# Allegro board ESP32_LED4.brd
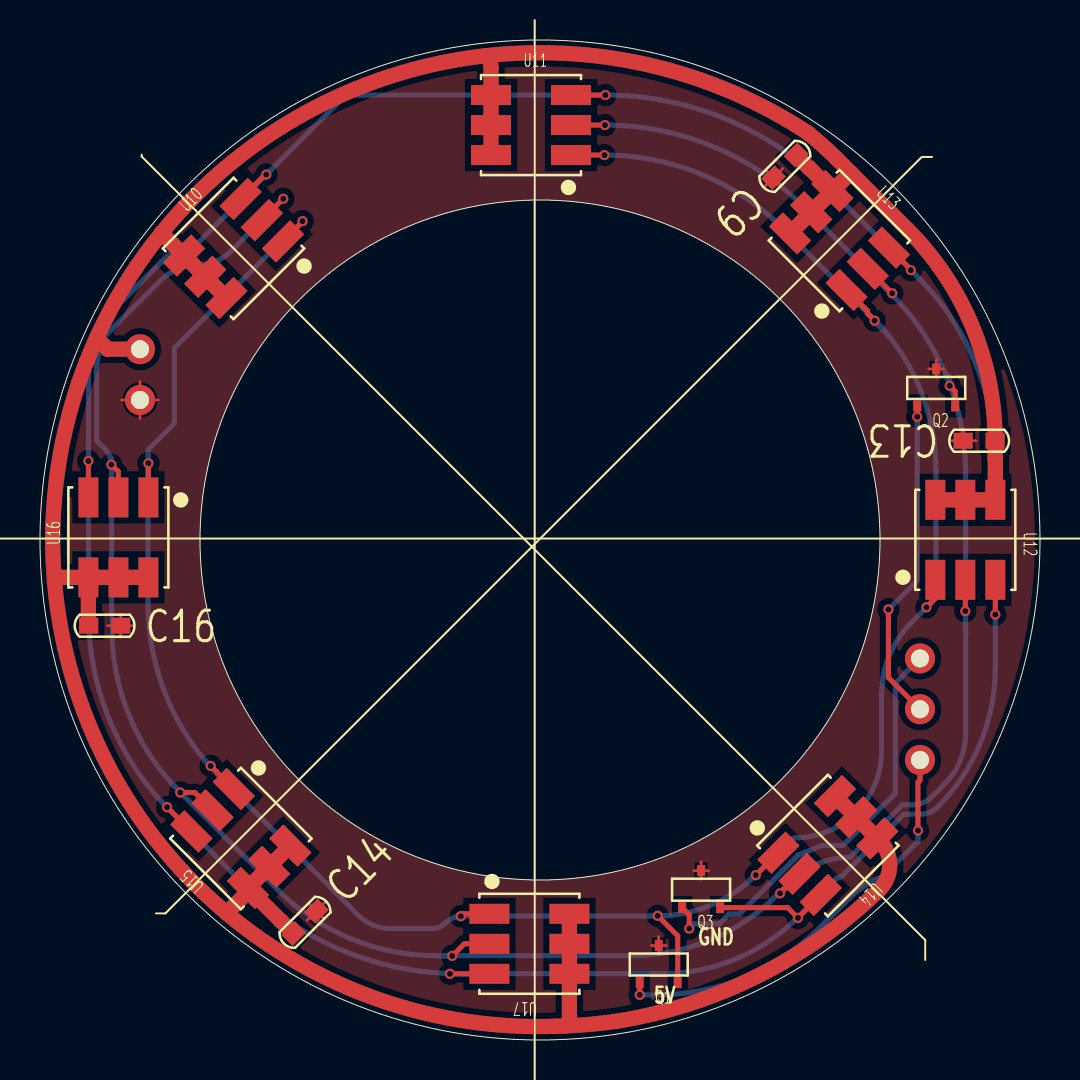
[diagram p0: board, top side]
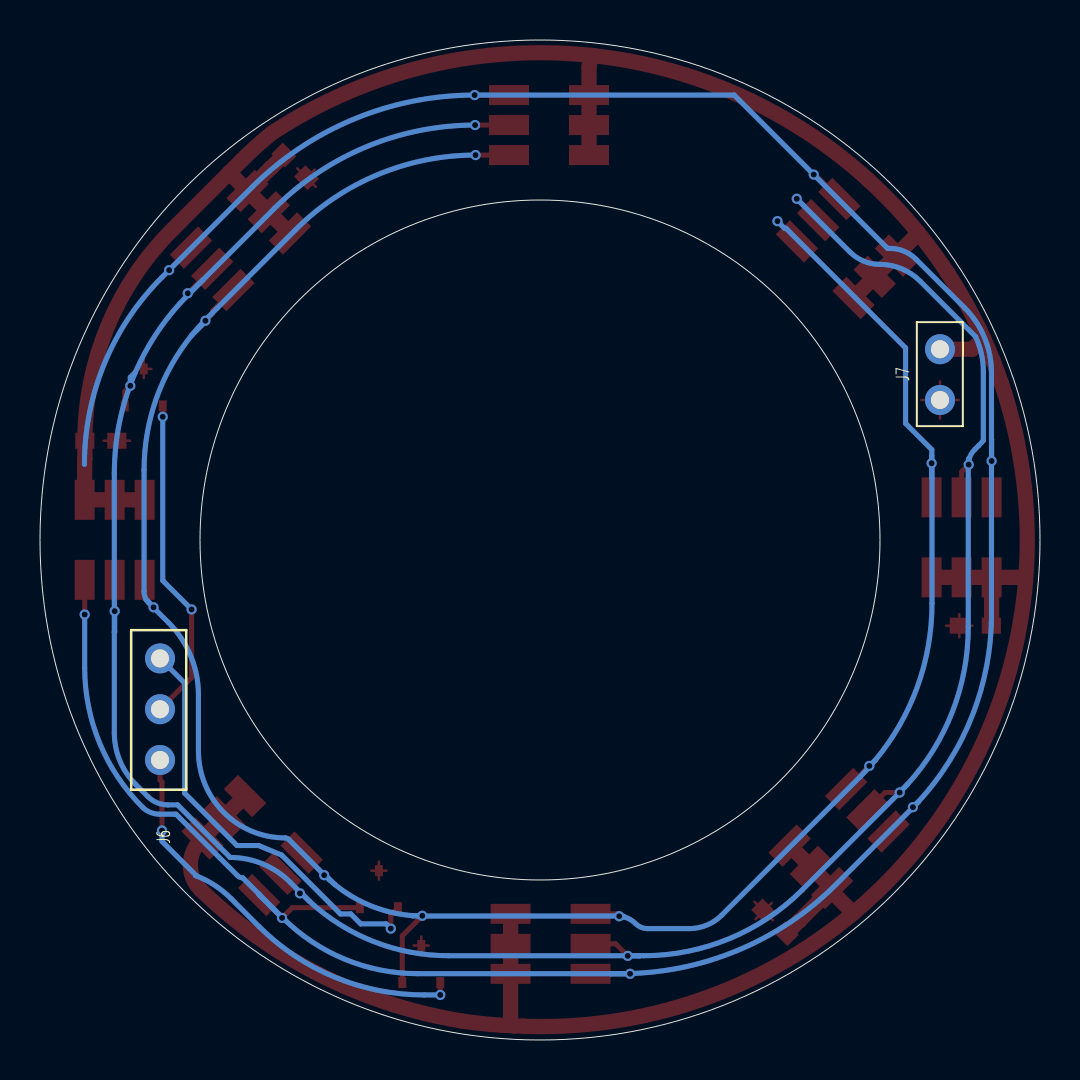
[diagram p1: board, bottom side, seen from below]

Outline 50 x 50 mm; copper layers: TOP, BOTTOM. Coordinates in mm from the lower left corner of the outline.
Outline path: circle c25,25 r17 ; circle c25,25 r25

## Placement (name value [footprint] x y rotation side)
C9  0.1uF/16V  [C0603]  37.81 44.25 225 top
C13  0.1uF/16V  [C0603]  47.76 29.96 180 top
C14  0.1uF/16V  [C0603]  12.69 5.32 45 top
C16  0.1uF/16V  [C0603]  2.43 20.71 0 top
J6  CON3  [CON_2_54_3P]  44 14 90 bottom
J7  CON2  [CON_2_54_2P]  5 32 90 bottom
Q1  S8050(NPN)  [SOT23-3]  30.94 4.72 0 top
Q2  S8050(NPN)  [SOT23-3]  44.81 33.55 0 top
Q3  S8050(NPN)  [SOT23-3]  33.05 8.47 0 top
U10  RGB  [RGB_6]  9.68 39.58 45 top
U11  RGB  [RGB_6]  24.55 45.75 0 top
U12  RGB  [RGB_6]  46.27 25.01 270 top
U13  RGB  [RGB_6]  39.97 39.97 315 top
U14  RGB  [RGB_6]  39.39 9.72 225 top
U15  RGB  [RGB_6]  10.04 10.07 135 top
U16  RGB  [RGB_6]  3.92 25.13 90 top
U17  RGB  [RGB_6]  24.47 4.81 180 top

## Library data of the parts
C9 C13 C14 C16 = CAP NP
J6 = CON3
J7 = CON2
Q1-Q3 = NPN BCE
U10-U17 = LED_RGB

## Footprints (pads in the part's own frame, mm; a bottom-side part is the same pattern mirrored in y, then rotated)
C0603
  rect 0.96x0.8 smd: 1(0,0) 2(1.6,0)
CON_2_54_2P
  round 1.5 hole 0.9: 1(0,0) 2(2.54,0)
CON_2_54_3P
  round 1.5 hole 0.9: 1(0,0) 2(2.54,0) 3(5.08,0)
RGB_6
  rect 2x1 smd: 1(2,-1.5) 2(2,0) 3(2,1.5) 4(-2,1.5) 5(-2,0) 6(-2,-1.5)
SOT23-3
  rect 0.4x0.55 smd: 1(-0.95,-1.85) 2(0.95,-1.85) 3(0,0)

## Nets
GND: C9.2 C13.2 C14.2 C16.2 J7.1 Q1.3(E) Q2.3(E) Q3.3(E)
VDD33: C9.1 C13.1 C14.1 C16.1 J7.2 U10.4(BA) U10.5(GA) U10.6(RA) U11.4(BA) U11.5(GA) U11.6(RA) U12.4(BA) U12.5(GA) U12.6(RA) U13.4(BA) U13.5(GA) U13.6(RA) U14.4(BA) U14.5(GA) U14.6(RA) U15.4(BA) U15.5(GA) U15.6(RA) U16.4(BA) U16.5(GA) U16.6(RA) U17.4(BA) U17.5(GA) U17.6(RA)
B: J6.3 Q3.1(B)
G: J6.2 Q2.1(B)
LED_B: Q3.2(C) U10.3(BK) U11.3(BK) U12.3(BK) U13.3(BK) U14.3(BK) U15.3(BK) U16.3(BK) U17.3(BK)
LED_G: Q2.2(C) U10.2(GK) U11.2(GK) U12.2(GK) U13.2(GK) U14.2(GK) U15.2(GK) U16.2(GK) U17.2(GK)
LED_R: Q1.2(C) U10.1(RK) U11.1(RK) U12.1(RK) U13.1(RK) U14.1(RK) U15.1(RK) U16.1(RK) U17.1(RK)
R: J6.1 Q1.1(B)

## Via types
v1: diameter 0.508, hole 0.305, TOP to BOTTOM, 31 vias

## Routing (per net, layer and track width the routed paths; a pad name or vN(x,y) marks a point on that pad's centre or on a via; arc(x,y) is an arc through that point)
GND: length 18.6
  TOP w0.127: C9.2 37.14,43.58 ; C9.2 36.27,43.52 ; C9.2 36.21,42.65 ; C9.2 37.08,42.71 ; Q3.3 33.43,8.47 ; Q3.3 33.05,8.01 ; Q3.3 32.68,8.47 ; Q3.3 33.05,8.92 ; 44.43,33.55 Q2.3 ; Q2.3 44.81,34.01 ; Q2.3 45.19,33.55 ; Q2.3 44.81,33.1 ; 13.41,6.86 C14.2 ; C14.2 13.35,5.98 ; C14.2 14.28,6.91 ; C14.2 14.23,6.04 ; Q1.3 30.94,5.18 ; Q1.3 30.94,4.27 ; Q1.3 30.56,4.72 ; Q1.3 31.31,4.72 ; 46.16,29.39 C13.2 ; C13.2 46.81,29.96 ; C13.2 45.5,29.96 ; C13.2 46.16,30.54 ; C16.2 4.03,21.29 ; C16.2 4.03,20.14 ; C16.2 4.69,20.71 ; C16.2 3.38,20.71 ; 5,31.07 J7.1 ; J7.1 5.93,32 ; J7.1 4.07,32 ; J7.1 5,32.93
VDD33: length 179.8
  TOP w0.762: U13.4 38.46,43.61 38.45,43.61 C9.1 37.86,44.3 ; U13.4 39.62,42.45 40.53,43.37 ; U13.4 U13.5 U13.6 ; U16.4 2.42,20.73 C16.1 ; U16.4 U16.5 U16.6 ; U16.4 0.95,23.13 0.73,22.91 ; 6.07,40.35 7.2,39.22 U10.4 U10.5 U10.6 ; 6.07,40.35 arc(7.27,41.71) 8.56,42.98 8.59,43.01 arc(14.96,47.2) 22.3,49.22 ; 6.07,40.35 arc(5.32,39.37) 4.62,38.36 4.59,38.31 arc(3.65,36.74) 2.82,35.09 ; 22.3,49.22 22.36,49.22 arc(30.72,48.68) 38.4,45.35 arc(39.16,44.7) 39.88,44.02 40.53,43.37 ; 22.3,49.22 arc(22.49,48.94) 22.55,48.62 U11.4 U11.5 U11.6 ; 9.33,6.34 10.4,7.41 U15.4 ; 9.33,6.34 arc(17.05,1.98) 25.82,0.69 26.29,0.71 ; 9.33,6.34 arc(8.74,6.86) 8.16,7.39 arc(3.03,14.47) 0.73,22.91 ; 2.37,33.96 2.32,33.91 ; 2.32,33.91 arc(2.13,33.4) 1.94,32.88 arc(0.82,27.96) 0.73,22.91 ; 2.32,33.91 arc(2.57,34.51) 2.82,35.09 ; U15.4 12.04,5.96 12.04,5.96 C14.1 ; U15.4 U15.5 U15.6 ; 26.29,0.71 26.47,0.88 U17.4 U17.5 U17.6 ; 26.29,0.71 arc(27.59,0.79) 28.89,0.95 arc(35.94,3.23) 41.98,7.52 arc(42.48,8.75) 41.98,9.97 U14.4 U14.5 U14.6 ; 40.53,43.37 43.38,40.52 arc(46.62,35.67) C13.1 47.76,29.06 47.77,29.04 U12.4 U12.5 U12.6 ; J7.2 3.38,34.54 2.82,35.09
B: length 21.5
  TOP w0.254: Q3.1 32.46,6.26 v1(32.46,5.57)
  BOTTOM w0.254: v1(32.46,5.57) 32.7,5.81 33.96,5.81 34.46,6.3 34.98,6.3 37.92,9.25 39.07,9.72 40.15,9.72 42.76,12.34 42.76,17.84 J6.3
G: length 16.4
  TOP w0.254: v1(42.42,21.53) 42.42,18.12 J6.2 ; Q2.1 v1(43.86,31.16)
  BOTTOM w0.254: v1(42.42,21.53) 43.86,22.97 v1(43.86,31.16)
LED_B: length 161.2
  TOP w0.254: U10.3 11.25,43.27 v1(11.31,43.27) ; U17.3 v1(20.5,3.31) ; v1(43.54,38.49) 43.54,38.53 U13.3 ; U12.3 v1(47.77,21.27) ; U15.3 v1(6.35,11.64) ; Q3.2 37.38,6.62 v1(37.9,6.1) U14.3 ; U11.3 v1(28.27,47.25) ; U16.3 v1(2.42,28.95)
  BOTTOM w0.254: v1(6.35,11.64) 6.06,11.93 ; 6.06,11.93 arc(6.27,11.71) 6.48,11.5 10.22,7.76 arc(15.14,4.47) 20.94,3.32 21.48,3.32 ; 6.06,11.93 arc(3.37,16.26) 2.43,21.28 2.43,30.02 ; v1(2.42,28.95) 2.42,30.01 2.43,30.02 ; v1(47.77,21.27) 47.77,18.61 arc(47.02,14.84) 44.88,11.65 arc(44.49,11.38) 44.02,11.29 43.29,11.29 arc(43.24,11.29) 43.19,11.29 40.12,8.21 arc(40,8.14) 39.86,8.11 39.05,7.3 ; v1(20.5,3.31) 21.47,3.31 21.48,3.32 ; 2.43,30.02 2.43,33.36 arc(2.78,35.12) 3.77,36.61 6.2,39.04 arc(6.8,39.44) 7.5,39.58 7.62,39.58 v1(11.31,43.27) 15.29,47.25 v1(28.27,47.25) arc(34.29,46.05) 39.4,42.64 v1(43.54,38.49) 43.91,38.13 arc(46.77,33.84) 47.78,28.78 ; 39.05,7.3 39.05,7.26 v1(37.9,6.1) ; 39.05,7.3 37.87,6.11 arc(34.77,4.04) 31.12,3.32 21.48,3.32
LED_G: length 142.5
  TOP w0.254: v1(3.57,28.77) 3.92,28.41 U16.2 ; U12.2 v1(46.27,21.44) ; Q2.2 45.76,32.43 v1(45.49,32.71) ; U17.2 21.22,4.81 v1(20.61,4.21) ; U14.2 v1(37,7.33) ; v1(12.16,42.06) 12.16,42.06 U10.2 ; v1(7.01,12.37) 7.74,12.37 U15.2 ; U11.2 v1(28.25,45.75) ; U13.2 v1(42.61,37.34)
  BOTTOM w0.254: 20.02,4.21 19.82,4.21 arc(15.53,5.07) 11.89,7.5 7.01,12.38 arc(6.81,12.58) 6.62,12.79 ; 20.02,4.21 20.02,4.21 v1(20.61,4.21) ; 20.02,4.21 29.58,4.21 arc(33.3,4.92) 36.52,6.93 ; v1(3.57,28.77) 3.57,29.06 3.53,29.1 ; 41.83,38.02 42.59,37.27 arc(42.8,37.05) 43.01,36.83 arc(44.26,35.2) 45.23,33.39 ; 41.83,38.02 38.25,41.6 arc(33.66,44.67) v1(28.25,45.75) ; 41.83,38.02 42.52,37.34 v1(42.61,37.34) ; 46.28,20.38 46.27,20.4 v1(46.27,21.44) ; 46.28,20.38 46.28,15.35 arc(46.01,13.96) 45.22,12.79 44.6,12.17 arc(44.15,11.86) 43.61,11.76 43.12,11.76 40.49,9.13 arc(38.86,8.8) 37.48,7.88 36.82,7.21 arc(36.67,7.07) 36.52,6.93 ; 46.28,20.38 46.28,28.34 arc(46.02,30.92) 45.23,33.39 ; v1(45.49,32.71) 45.49,33.13 45.23,33.39 ; 6.62,12.79 7.01,12.4 v1(7.01,12.37) ; 6.62,12.79 arc(4.37,16.43) 3.59,20.65 3.59,28.75 arc(3.57,28.93) 3.53,29.1 ; v1(37,7.33) 36.92,7.33 36.52,6.93 ; v1(12.16,42.06) 9.5,39.4 arc(8.82,38.94) 8.01,38.78 arc(6.92,38.57) 6,37.95 3.22,35.17 arc(2.93,34.32) 2.83,33.42 2.83,29.98 arc(2.94,29.85) 3.06,29.72 3.27,29.52 arc(3.42,29.32) 3.53,29.1
LED_R: length 133.3
  TOP w0.254: U16.1 v1(5.42,28.84) ; v1(30.88,6.21) 31.89,5.21 Q1.2 ; U14.1 v1(35.79,8.24) ; v1(41.73,35.96) 41.37,36.32 41.37,36.46 U13.1 ; v1(44.32,21.63) 44.77,22.08 U12.1 ; 12.15,39.93 13.13,40.91 v1(13.13,40.94) ; U17.1 21.16,6.31 v1(21.04,6.19) ; U15.1 v1(8.53,13.7) ; U11.1 v1(28.22,44.25)
  BOTTOM w0.254: 42.43,35.21 41.73,35.92 v1(41.73,35.96) ; 42.43,35.21 arc(44.19,32.06) 44.8,28.51 44.8,22.42 arc(44.77,22.22) 44.7,22.03 ; 42.43,35.21 arc(42.06,35.65) 41.66,36.07 41.15,36.58 37.21,40.52 arc(33.09,43.28) v1(28.22,44.25) ; 31.38,6.22 31.37,6.21 v1(30.88,6.21) ; 31.38,6.22 arc(31.11,6.2) 30.84,6.2 21.13,6.2 arc(20.96,6.19) 20.79,6.15 ; 31.38,6.22 arc(33.44,6.7) 35.26,7.78 ; v1(44.32,21.63) 44.32,21.66 44.7,22.03 ; 5.4,28.09 5.4,28.75 arc(5.4,28.99) 5.41,29.22 5.41,29.52 6.72,30.83 6.72,34.6 12.7,40.58 12.77,40.58 v1(13.13,40.94) ; 5.4,28.09 5.4,21.83 arc(6.13,17.67) 8.23,14 ; 5.4,28.09 5.42,28.11 v1(5.42,28.84) 5.42,29.22 ; v1(35.79,8.24) 35.73,8.24 35.26,7.78 ; 44.7,22.03 arc(44.64,21.95) 44.57,21.87 43.58,20.87 arc(42.47,19.21) 42.08,17.25 42.08,14.44 arc(40.81,11.37) 37.74,10.1 arc(37.65,10.09) 37.56,10.03 35.77,8.24 arc(35.65,8.12) 35.51,7.99 arc(35.39,7.88) 35.26,7.78 ; v1(8.53,13.7) 8.52,13.7 8.23,14 ; 8.23,14 arc(8.6,13.57) 8.99,13.16 15.91,6.24 arc(16.66,5.74) 17.53,5.57 19.61,5.57 arc(19.95,5.64) 20.23,5.82 arc(20.49,6.03) 20.79,6.15 ; 20.79,6.15 20.83,6.19 v1(21.04,6.19)
R: length 21.2
  TOP w0.254: Q1.1 v1(29.99,2.25) ; J6.1 44,13 43.9,12.9 v1(43.9,10.47)
  BOTTOM w0.254: v1(43.9,10.47) 43.9,9.93 42.21,8.25 42.21,8.22 arc(41.27,7.74) 40.45,7.07 39.05,5.67 arc(35.26,3.14) 30.79,2.25 v1(29.99,2.25)

## Copper pours and planes (outline as drawn; the poured copper is in the pictures)
GND on TOP: 0.25,25 49.75,25

## Text on the board
Ref Des/Silkscreen Top: 5V | GND
NCLEGEND-1-2: FIGURE | SIZE | 12.0 | 20.0 | DRILL CHART: TOP to BOTTOM | ALL UNITS ARE IN MILS | PLATED | QTY | 2 | 54
